# Altium PCB Infrared.PcbDoc
Units mil, origin at the board's own origin, x right, y up, seen from the top; angles counter-clockwise.
Board outline 6000 x 4000 mil, 2 copper layers (Top Layer, Bottom Layer); 14 components, 7 nets, 35 pads, 11 vias.
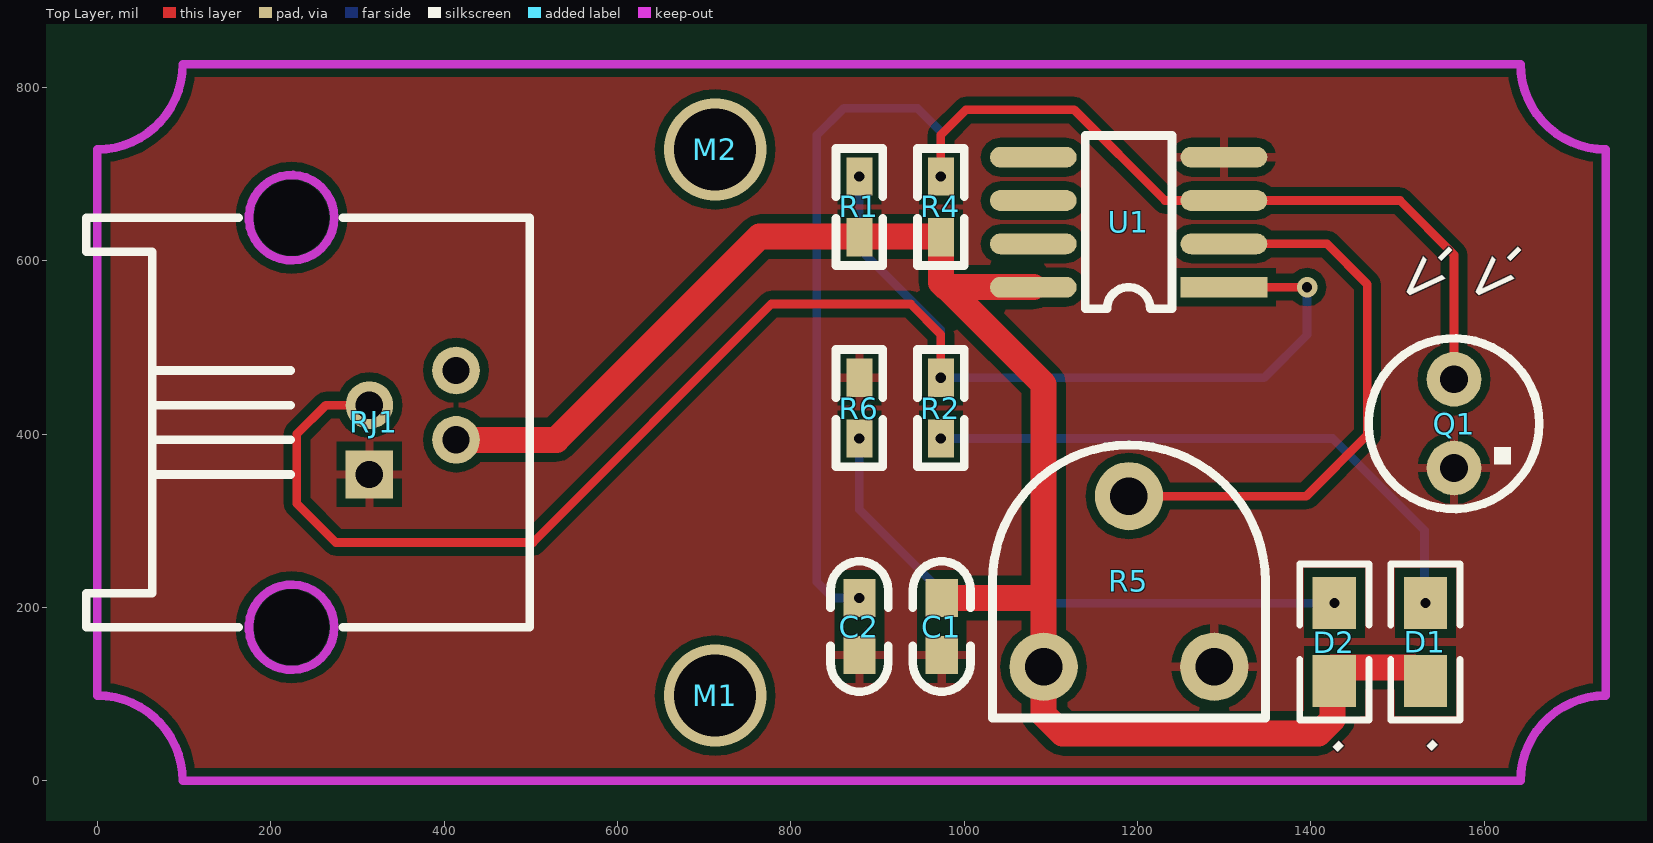
[diagram p0: Top Layer view]
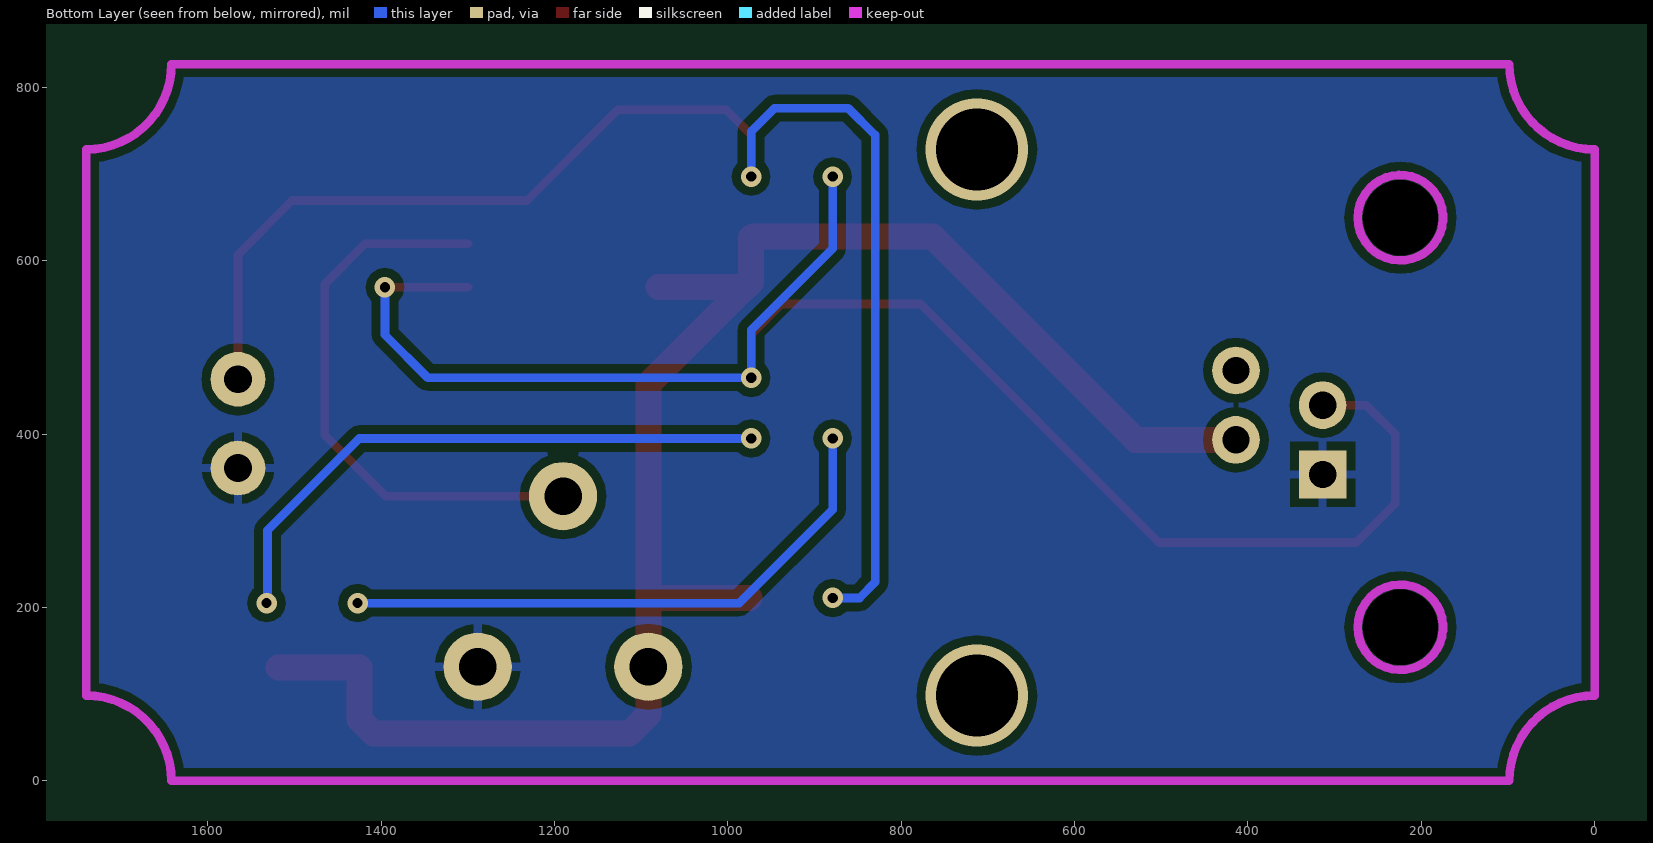
[diagram p1: Bottom Layer view, seen from below]

## Layer stack, top to bottom
Top Solder: solder mask 0.4, Solder Resist, Dk 3.5
Top Layer: signal copper 1.4
Dielectric 1: dielectric 12.6, FR-4, Dk 4.8
Bottom Layer: signal copper 1.4
Bottom Solder: solder mask 0.4, Solder Resist, Dk 3.5

## Board outline
-2066.93,-1421.26 3933.07,-1421.26 3933.07,2578.74 -2066.93,2578.74

## Design rules (kind name [scope] priority, off if disabled: settings)
Clearance [All] p1: gap=10
PolygonConnect [All] p1: connectstyle=Relief reliefconductorwidth=10 reliefentries=4 polygonreliefangle="90 Angle" airgapwidth=10
RoutingVias [All] p1: holewidth=28 width=50 viastyle="Through Hole" minholewidth=28 minwidth=50 maxholewidth=28 maxwidth=50
SolderMaskExpansion [All] p1: expansion=4
Width [All] p1: maxlimit=100 minlimit=10 preferedwidth=10
29 further rules are at their usual default settings.

## Components (designator, comment, footprint, x,y, rotation, side; value= is the part's Value field where it differs from the comment)
C1 "Cap" 0603_C 974,178 r0 top
C2 "Cap" 0603_C 879,178 r0 top
D1 "LED" 0805 1532,115 r90 top
D2 "LED" 0805 1427,115 r90 top
M1 "M2" M2 712.6,98.43 r0 top
M2 "M2" M2 712.6,728.35 r0 top
Q1 "Photo NPN" 红外 1560,407 r270 top
R1 "Res2" 0603_R 879,662 r0 top
R2 "Res2" 0603_R 973,430 r0 top
R4 "Res2" 0603_R 973,662 r0 top
R5 "RPot" 电位器 1190,230 r180 top
R6 "Res2" 0603_R 879,430 r0 top
RJ1 "RJ11" RJ11 318.9,413.39 r90 top
U1 "LM393" SO-8 1189.6,644.43 r270 top

## Footprints (in the part's own frame and the unit in brackets; to place one, negate y for a bottom-side part, rotate by r counter-clockwise, add the part's x,y. Pads: shape width x height; smd on the part's side, far side on the other; paste and mask are expansions set on the pad)
0603_C [mil]
  rect 37x44 smd: 1(0,-33) 2(0,33)
  silkscreen extent -33,-75 33,75
0603_R [mil]
  rect 30x44 smd: 1(0,35) 2(0,-35)
  silkscreen extent -27,-68 27,68, body extent -19,-52 20,50, height 21
0805 [mil]
  rect 60x50 smd: 1(0,0) 2(90,0)
  silkscreen extent -45,-40 135,40
M2 [mil]
RJ11 [mm]
  round 2.1 hole 2.2 unplated: 0(-6,2.41) 0(6,2.41)
  rect 1.397x1.397 hole 0.8: 1(-1.524,0.13)
  round 1.397 hole 0.8: 2(-0.508,-2.41) 3(0.508,0.13) 4(1.524,-2.41)
  Keep-Out Layer circle w0.254: c-6,2.41 r1.25
  Keep-Out Layer circle w0.254: c6,2.41 r1.25
  silkscreen extent -6,-4.57 6,8.43
SO-8 [mil]
  rect 24x100 smd: 1(75,110)
  oval 24x100 smd: 2(25,110) 3(-25,110) 4(-75,110) 5(-75,-110) 6(-25,-110) 7(25,-110) 8(75,-110)
  silkscreen extent -100,-50 100,50
电位器 [mm]
  round 2 hole 1.1: 1(-2.5,2.5) 2(2.5,2.5) 3(0,-2.5)
  silkscreen extent -4,-4 4,4
红外 [mm]
  round 1.6 hole 0.813: 1(1.173,0.127) 2(-1.427,0.127)
  silkscreen extent -2.63,-2.37 2.37,2.63

## Part data
C1 C2: "Capacitor"
D1 D2: library part LED1, "Typical RED GaAs LED"
M1 M2: library part M3
Q1: "NPN Phototransistor"
R1 R2 R4 R6: "Resistor"
R5: "Potentiometer"

## Via types
v1: diameter 23.62, hole 11.81, Top Layer to Bottom Layer, 9 vias
v2: diameter 118.11, hole 94.49, Top Layer to Bottom Layer, 2 vias

## Nets (pads, with @x,y where several pads share a name; then routed paths per layer and width w, separated by ;. In a path a pad name is that pad's centre, name@x,y a point inside that pad or via, vN(x,y) a via of type N, cw(c..) or ccw(c..) an arc to the next point about the centre after c; other vN are vias at no path point)
A+: C2.2 Q1.2 R4.1 U1.3 | length 1656.5
  Top Layer w10: v1(973,697) 973,745 1002,774 1127,774 1231.57,669.43 U1.3 1502.57,669.43 1565,607 Q1.2
  Bottom Layer w10: v1(879,211) 848,211 830,229 830,745 861,776 946,776 973,749 v1(973,697)
A-: R5.3 U1.2 | length 662.9
  Top Layer w10: R5.3 1394.43,328.43 1465,399 1465,573 1418.57,619.43 U1.2
GND: C1.1 C2.1 Q1.1 R5.1 R6.1 RJ1.1 U1.4
NetD1_2: D1.2 R2.2 | length 685.9
  Bottom Layer w10: v1(973,395) 1425,395 1531,289 v1@1531,205
  other v1: 1532,205
NetD2_2: D2.2 R6.2 | length 674.7
  Bottom Layer w10: v1(879,395) 879,313 987,205 v1(1427,205)
OUT_A: R1.1 R2.1 RJ1.3 U1.1 | length 1983.1
  Top Layer w10: RJ1.3 263.39,433.39 230,400 230,320 275,275 502.43,275 777.43,550 938,550 973,515 v1(973,465) ; U1.1 v1(1395.43,569.43) v1@1396,570
  Bottom Layer w10: v1(879,697) 879,614 973,520 v1(973,465) 1346,465 1395.43,514.43 v1(1395.43,569.43)
VCC: C1.2 D1.1 D2.1 R1.2 R4.2 R5.2 RJ1.2 U1.8 | length 1974
  Top Layer w30: RJ1.2 529.39,393.39 764,628 R4.2@971,628 ; R4.2 973,575 978.57,569.43 U1.8 ; C1.2@975,211 1090.57,211 1091.57,212 ; 979.57,569.43 1091.57,457.43 1091.57,212 ; D1.1@1518,131 1425,131 1425,71 1408.57,54.57 1113.43,54.57 1091.57,76.43 R5.2 1091.57,212
pads on no net: RJ1.0 RJ1.4 U1.5 U1.6 U1.7
copper on no net:
  other v2: 712.6,98.43 712.6,728.35

## Polygon pours and split planes (outlines as drawn)
GND on Top Layer "Top Layer-No Net" (solid, remove dead copper, pour order 2): -108,897 -103,892 1864,892 1864,-36 1824,-76 1811,-89 -71,-89
GND on Bottom Layer "Top Layer-No Net" (solid, remove dead copper, pour order 4): -66,913 1814,913 1859,868 1819,828 1819,-100 -79,-100 -90,-89

## Keep-outs
Keep-Out Layer:
  lines w10: 0,98.43 cw(c0,0) 98.43,0 1641.73,0 cw(c1740.16,0) 1740.16,98.43 1740.16,728.35 cw(c1740.16,826.77) 1641.73,826.77 98.43,826.77 cw(c0,826.77) 0,728.35 0,98.43

## Silkscreen, mask and mechanical layers (free items; w line width, h text height)
Top Overlay:
  text "->" at 1550,630 h50 r225
  text "->" at 1630,630 h50 r225
  text "." at 1527,46 h60 r315
  text "." at 1419,45 h60 r315

## Text inside footprints (layer, text, board x,y; h text height)
RJ1: Mechanical 1 "1" at 223.23,343.39 h39.37 r270; Mechanical 1 "2" at 443.23,383.39 h39.37 r270; Mechanical 1 "3" at 223.23,423.39 h39.37 r270; Mechanical 1 "4" at 443.23,463.39 h39.37 r270; Mechanical 1 "1" at 43.23,333.39 h39.37 r270; Mechanical 1 "4" at 43.23,473.39 h39.37 r270